# EAGLE board placa (EAGLE 9.7.0)
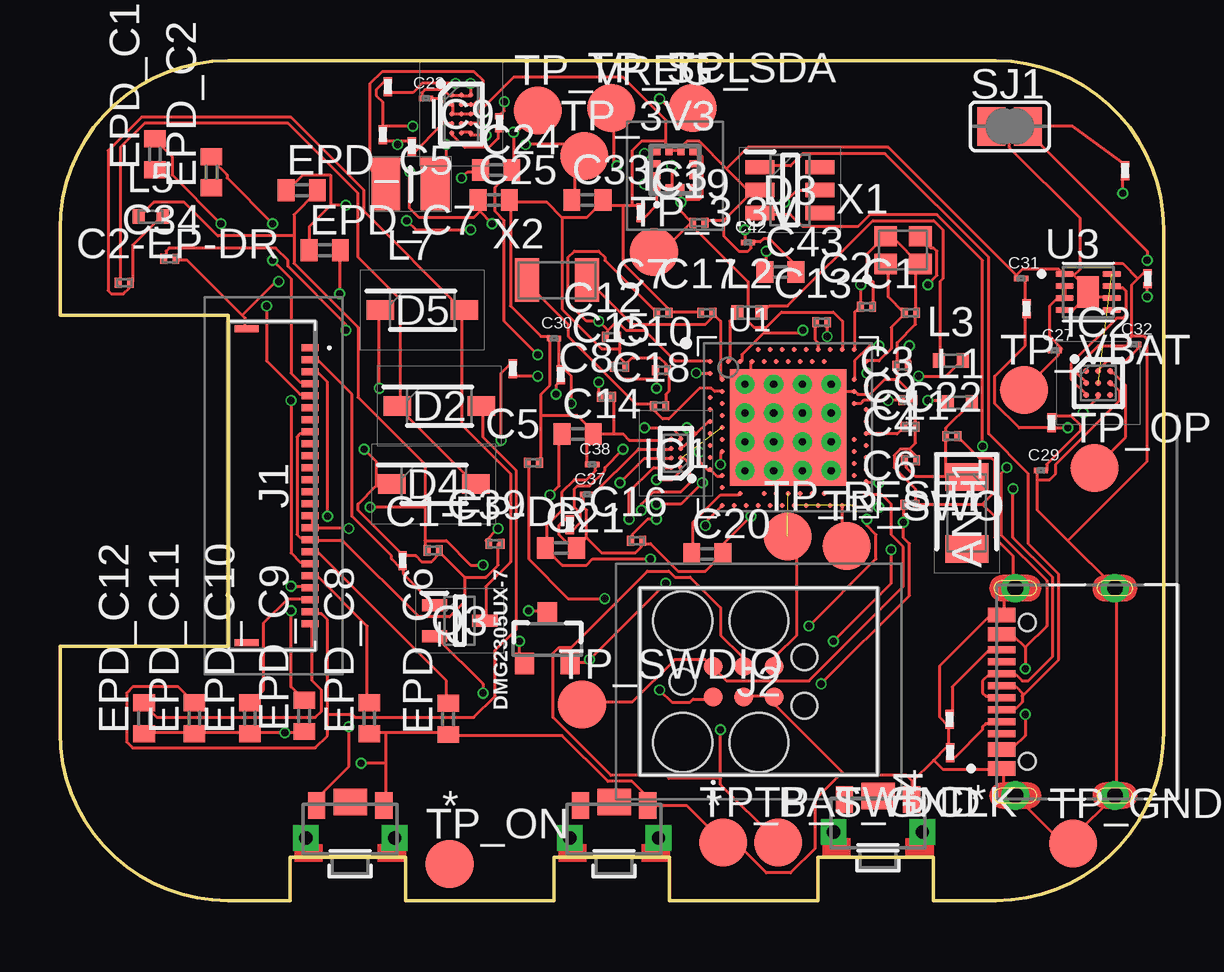
[diagram p0: board, top side]
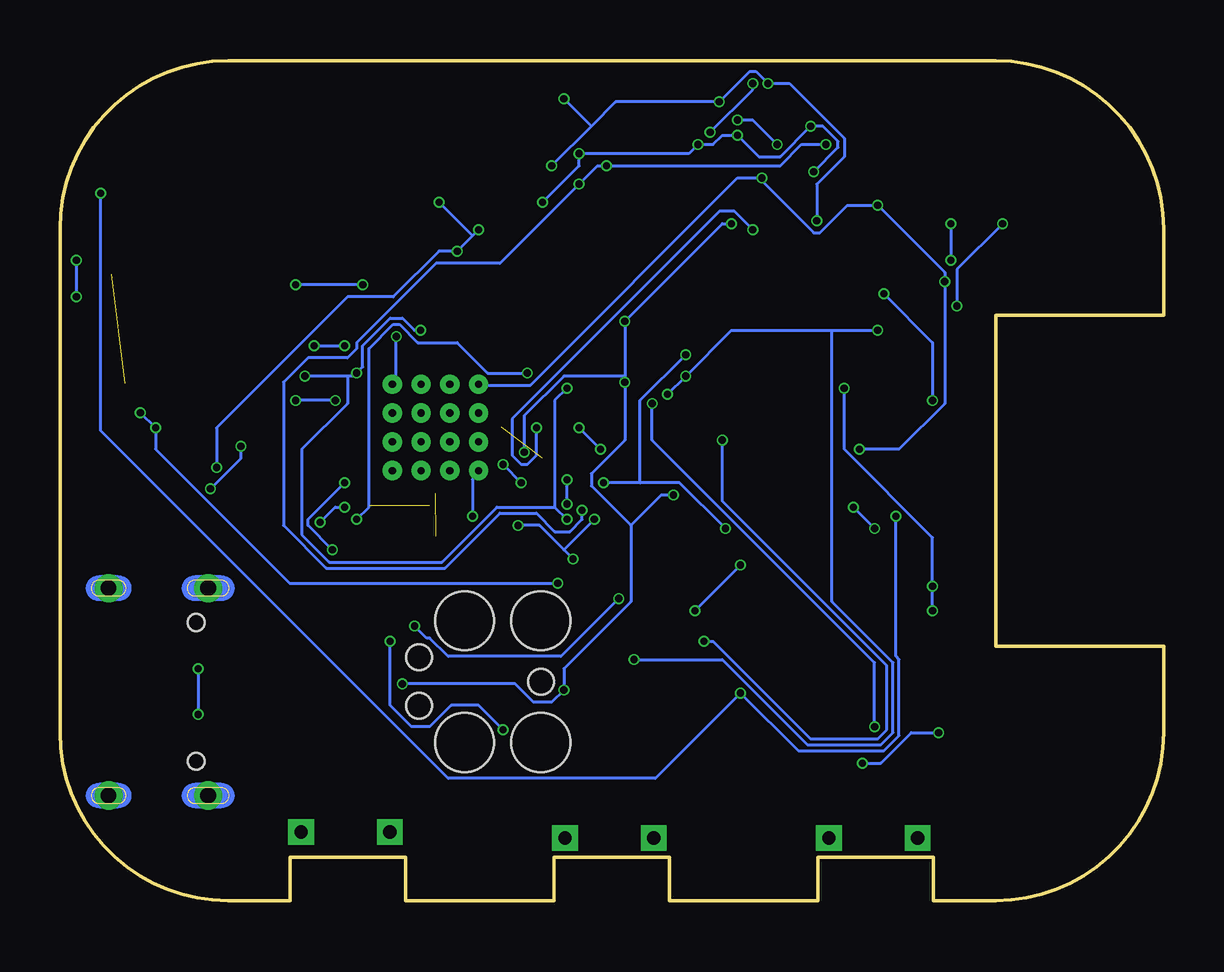
[diagram p1: board, bottom side, seen from below]

Size 46 x 35 mm. Coordinates in mm from the lower left corner, seen from the top.
Outline: 39,0 36.4,0 36.4,1.8 31.6,1.8 31.6,0 25.4,0 25.4,1.8 20.6,1.8 20.6,0 14.4,0 14.4,1.8 9.6,1.8 9.6,0 7,0 arc-90 0,7 0,10.6 7,10.6 7,24.4 0,24.4 0,28 arc-90 7,35 39,35 arc-90 46,28 46,7 arc-90 39,0
Copper layers (1*16): Top / Bottom
Stack-up Default Layer Stack: Top User Defined 0.035mm / Dielectric-1 User Defined 1.6mm / Bottom User Defined 0.035mm
Design rules: minimum drill size 0.3mm, minimum copper width 5mil, keepout clearance 0mil, drill distance 6mil, via restrict clearance 0mil, dimension clearance 0.2mm, restrict clearance 0mil, copper clearance wire_polygon to wire_polygon 5mil, copper clearance wire_polygon to pad_smd 5mil, copper clearance wire_polygon to via 5mil, copper clearance pad_smd to pad_smd 5mil, copper clearance pad_smd to via 5mil, copper clearance via to via 5mil, copper clearance smd to pad (same net) 5mil, copper clearance smd to via (same net) 5mil, copper clearance smd to smd (same net) 5mil

## Footprints (pad centres in the part's own frame; a part is rotated, then mirrored left to right if it is on the bottom)
2450AT18B100E_ANTC3216X140N = smd 1.15 x 1.8: 1 -1.5,0; 2 1.5,0
NORDIC_NRF_3_RESC0201_L = smd 0.28 x 0.43: 1 -0.255,0; 2 0.255,0
ESP32_C6_LIBRARY_1_ESP32_WROVER_EAGLE-LTSPICE_C0402 = smd 0.7 x 0.9: 1 -0.65,0; 2 0.65,0
GRM011R60J152KE01L_2_CAPC0201X13N = smd 0.22 x 0.23: 1 -0.185,0; 2 0.185,0
ESP32_C6_LIBRARY_5_SOD3716X135N = smd 1.15 x 0.8: 1 -1.75,0; 2 1.75,0
ESP32_C6_LIBRARY_3_SOT95P280X145-6N = smd 1.2 x 0.6: 1 -1.25,0.95; 2 -1.25,0; 3 -1.25,-0.95; 4 1.25,-0.95; 5 1.25,0; 6 1.25,0.95
ESP32_C6_LIBRARY_4_ESP32_C6_LIBRARY_4_ESP32_C6_LIBRARY_4_ESP32_C6_LIBRARY_4_ESP32_WROVER_SPARKFUN-DISCRETESEMI_SOT23-3 = smd 0.8 x 0.9: 1 -0.95,-1; 2 0.95,-1; 3 0,1.1
BQ25180YBGR_BGA8C40P2X4_100X155X50 = smd 0.2 x 0.2: A1 -0.2,0.6; A2 0.2,0.6; B1 -0.2,0.2; B2 0.2,0.2; C1 -0.2,-0.2; C2 0.2,-0.2; D1 -0.2,-0.6; D2 0.2,-0.6
DRV2605YZFR_BGA9C50P3X3_144X144X62 = smd 0.25 x 0.25: A1 -0.5,0.5; A2 0,0.5; A3 0.5,0.5; B1 -0.5,0; B2 0,0; B3 0.5,0; C1 -0.5,-0.5; C2 0,-0.5; C3 0.5,-0.5
BMA423_BMA423 = smd 0.3 x 0.35: 1 -0.75,-0.775; 2 -0.25,-0.775; 3 0.25,-0.775; 4 0.75,-0.775; 7 0.75,0.775; 8 0.25,0.775; 9 -0.25,0.775; 10 -0.75,0.775 | smd 0.35 x 0.3: 5 0.775,-0.25; 6 0.775,0.25; 11 -0.775,0.25; 12 -0.775,-0.25
RT6160AWSC_BGA15C40P3X5_140X230X60 = smd 0.216 x 0.216: A1 -0.4,0.8; A2 0,0.8; A3 0.4,0.8; B1 -0.4,0.4; B2 0,0.4; B3 0.4,0.4; C1 -0.4,0; C2 0,0; C3 0.4,0; D1 -0.4,-0.4; D2 0,-0.4; D3 0.4,-0.4; E1 -0.4,-0.8; E2 0,-0.8; E3 0.4,-0.8
503480-2400_5034802400 = smd 0.3 x 0.7: 1 -5.75,1.525; 2 -5.25,1.525; 3 -4.75,1.525; 4 -4.25,1.525; 5 -3.75,1.525; 6 -3.25,1.525; 7 -2.75,1.525; 8 -2.25,1.525; 9 -1.75,1.525; 10 -1.25,1.525; 11 -0.75,1.525; 12 -0.25,1.525; 13 0.25,1.525; 14 0.75,1.525; 15 1.25,1.525; 16 1.75,1.525; 17 2.25,1.525; 18 2.75,1.525; 19 3.25,1.525; 20 3.75,1.525; 21 4.25,1.525; 22 4.75,1.525; 23 5.25,1.525; 24 5.75,1.525 | smd 0.3 x 1: MP1 -6.54,-1.125; MP2 6.54,-1.125
TC2030-IDC_TC2030IDC = smd 0.783 x 0.783: 1 -0.953,-0.635; 2 -0.953,0.635; 3 0.317,-0.635; 4 0.317,0.635; 5 1.588,-0.635; 6 1.588,0.635 | hole 2.451: -2.223,-2.54; -2.223,2.54; 0.952,-2.54; 0.952,2.54 | hole 1.067: -2.223,0; 2.857,-1.016; 2.857,1.016
KH-TYPE-C-16P_KINGHELM_KH-TYPE-C-16P = smd 0.6 x 1.15: A1_B12 -3.2,4.725; A4_B9 -2.4,4.725; A9_B4 2.4,4.725; A12_B1 3.2,4.725 | smd 0.3 x 1.15: A5 -1.25,4.725; A6 -0.25,4.725; A7 0.25,4.725; A8 1.25,4.725; B5 1.75,4.725; B6 0.75,4.725; B7 -0.75,4.725; B8 -1.75,4.725 | drill 0.65 pad 1.05: SH1 -4.32,0; SH2 4.32,0; SH3 -4.32,4.15; SH4 4.32,4.15 | hole 0.7: -2.89,3.65; 2.89,3.65
NORDIC_NRF_2_RESC0402_L = smd 0.5 x 0.6: 1 -0.5,0; 2 0.5,0
MLP2016SR47MT0S1_INDC2016X100N = smd 1.2 x 2.2: 1 -1.028,0; 2 1.028,0
ESP32_C6_LIBRARY_6_SOT65P210X110-3N = smd 1.05 x 0.5: 1 -1.05,0.65; 2 -1.05,-0.65; 3 1.05,0
ERA-1AEB3401C_0201 = smd 0.35 x 0.25: 1 0,0.275; 2 0,-0.275
CPF0201D7K68C1_0201 = smd 0.35 x 0.25: 1 0,0.275; 2 0,-0.275
ESP32_C6_LIBRARY_7_JUMPER_SJ = smd 1.168 x 1.6: 1 -0.762,0; 2 0.762,0
2025-10-22_07-23-44_LIBRARY_SW_EVP-AKE31A_PAN = smd 0.711 x 1.092: 1 -1.4,-0.972; 2 1.4,-0.972 | drill 0.559 pad 0.914 square: 3 -1.848,0.381; 4 1.848,0.381 | smd 1.397 x 1.092: 5 0,-1.124
HECTOR_WATCH_1_TP20R = smd 2 x 2: TP 0,0
NORDIC_NRF_4_AQFN50P700X700X85_HS-74N = smd 4.85 x 4.85: P$74 0,0 | drill 0.3 pad 0.6: P$75 -1.8,1.8; P$76 -0.6,1.8; P$77 0.6,1.8; P$78 1.8,1.8; P$79 -1.8,0.6; P$80 -0.6,0.6; P$81 0.6,0.6; P$82 1.8,0.6; P$83 -1.8,-0.6; P$84 -0.6,-0.6; P$85 0.6,-0.6; P$86 1.8,-0.6; P$87 -1.8,-1.8; P$88 -0.6,-1.8; P$89 0.6,-1.8; P$90 1.8,-1.8 | smd 0.2 x 0.2: P$A8 -1.25,3.25; P$A10 -0.75,3.25; P$A12 -0.25,3.25; P$A14 0.25,3.25; P$A16 0.75,3.25; P$A18 1.25,3.25; P$A20 1.75,3.25; P$A22 2.25,3.25; P$A23 2.75,3.25; P$AA24 3.25,-2.25; P$AB2 -2.75,-2.5; P$AC5 -2,-2.75; P$AC9 -1,-2.75; P$AC11 -0.5,-2.75; P$AC13 0,-2.75; P$AC15 0.5,-2.75; P$AC17 1,-2.75; P$AC19 1.5,-2.75; P$AC21 2,-2.75; P$AC24 3.25,-2.75; P$AD2 -2.75,-3.25; P$AD4 -2.25,-3.25; P$AD6 -1.75,-3.25; P$AD8 -1.25,-3.25; P$AD10 -0.75,-3.25; P$AD12 -0.25,-3.25; P$AD14 0.25,-3.25; P$AD16 0.75,-3.25; P$AD18 1.25,-3.25; P$AD20 1.75,-3.25; P$AD22 2.25,-3.25; P$AD23 2.75,-3.25; P$B1 -3.25,2.75; P$B3 -2.5,2.75; P$B5 -2,2.75; P$B7 -1.5,2.75; P$B9 -1,2.75; P$B11 -0.5,2.75; P$B13 0,2.75; P$B15 0.5,2.75; P$B17 1,2.75; P$B19 1.5,2.75; P$B24 3.25,2.75; P$C1 -3.25,2.25; P$D2 -2.75,2; P$D23 2.75,2; P$E24 3.25,1.75; P$F2 -2.75,1.5; P$F23 2.75,1.5; P$G1 -3.25,1.25; P$H2 -2.75,1; P$H23 2.75,1; P$J1 -3.25,0.75; P$J24 3.25,0.75; P$K2 -2.75,0.5; P$L1 -3.25,0.25; P$L24 3.25,0.25; P$M2 -2.75,0; P$N1 -3.25,-0.25; P$N24 3.25,-0.25; P$P2 -2.75,-0.5; P$P23 2.75,-0.5; P$R1 -3.25,-0.75; P$R24 3.25,-0.75; P$T2 -2.75,-1; P$T23 2.75,-1; P$U1 -3.25,-1.25; P$U24 3.25,-1.25; P$V23 2.75,-1.5; P$W1 -3.25,-1.75; P$W24 3.25,-1.75; P$Y2 -2.75,-2; P$Y23 2.75,-2
ESP32_C6_LIBRARY_SON50P200X200X80-9N = smd 0.76 x 0.27: 1 -0.985,0.75; 2 -0.985,0.25; 3 -0.985,-0.25; 4 -0.985,-0.75; 5 0.985,-0.75; 6 0.985,-0.25; 7 0.985,0.25; 8 0.985,0.75 | smd 0.9 x 1.3: 9 0,0
NORDIC_NRF_BT-XTAL_2016_N = smd 0.95 x 0.85: 1 -0.725,-0.575; 2 0.725,-0.575; 3 0.725,0.575; 4 -0.725,0.575
NORDIC_NRF_1_XTAL_3215_N = smd 1 x 1.8: 1 -1.25,0; 2 1.25,0

## Placement (x,y rotation side)
ANT1  2450AT18B100E  [2450AT18B100E_ANTC3216X140N]  37.8,16.16 270 top
C1  12pF  [NORDIC_NRF_3_RESC0201_L]  35.45,24.5 0 top
C1-EP-DR  10uF  [NORDIC_NRF_3_RESC0201_L]  15.56,14.59 0 top
C2  12pF  [NORDIC_NRF_3_RESC0201_L]  33.62,24.75 0 top
C2-EP-DR  4.7uF/25V  [NORDIC_NRF_3_RESC0201_L]  2.68,25.75 0 top
C3  1pF  [NORDIC_NRF_3_RESC0201_L]  35.34,20.85 0 top
C4  1pF  [NORDIC_NRF_3_RESC0201_L]  35.45,18.35 0 top
C5  100nF  [NORDIC_NRF_3_RESC0201_L]  19.73,18.25 0 top
C6  4.7µF  [NORDIC_NRF_3_RESC0201_L]  35.43,16.5 0 top
C7  100nF  [NORDIC_NRF_3_RESC0201_L]  25.13,24.5 0 top
C8  100nF  [NORDIC_NRF_3_RESC0201_L]  22.78,21 0 top
C9  820pF  [NORDIC_NRF_3_RESC0201_L]  35.43,19.75 0 top
C10  N.C.  [NORDIC_NRF_3_RESC0201_L]  25.08,22.1 0 top
C11  100pF  [NORDIC_NRF_3_RESC0201_L]  35.1,22.29 180 top
C12  100nF  [NORDIC_NRF_3_RESC0201_L]  22.98,23.5 0 top
C13  N.C.  [NORDIC_NRF_3_RESC0201_L]  31.75,24.1 0 top
C14  4.7µF  [ESP32_C6_LIBRARY_1_ESP32_WROVER_EAGLE-LTSPICE_C0402]  21.58,19.45 0 top
C15  1.0µF  [NORDIC_NRF_3_RESC0201_L]  23.33,22.25 0 top
C16  47nF  [NORDIC_NRF_3_RESC0201_L]  24.04,15 0 top
C17  12pF  [NORDIC_NRF_3_RESC0201_L]  26.96,24.5 0 top
C18  12pF  [NORDIC_NRF_3_RESC0201_L]  24.99,20.6 0 top
C19  100nF  [NORDIC_NRF_3_RESC0201_L]  26.63,28.25 0 top
C20  4.7µF  [ESP32_C6_LIBRARY_1_ESP32_WROVER_EAGLE-LTSPICE_C0402]  26.98,14.45 0 top
C21  4.7µF  [ESP32_C6_LIBRARY_1_ESP32_WROVER_EAGLE-LTSPICE_C0402]  20.88,14.69 0 top
C22  N.C.  [NORDIC_NRF_3_RESC0201_L]  37.17,19.35 0 top
C23  0.1uF  [GRM011R60J152KE01L_2_CAPC0201X13N]  15.26,33.42 0 top
C24  10uF  [ESP32_C6_LIBRARY_1_ESP32_WROVER_EAGLE-LTSPICE_C0402]  18.18,30.45 0 top
C25  22uF  [ESP32_C6_LIBRARY_1_ESP32_WROVER_EAGLE-LTSPICE_C0402]  18.08,29.2 0 top
C27  0.1uF  [GRM011R60J152KE01L_2_CAPC0201X13N]  41.47,22.92 0 top
C29  1uF  [GRM011R60J152KE01L_2_CAPC0201X13N]  40.89,17.92 0 top
C30  1uF  [GRM011R60J152KE01L_2_CAPC0201X13N]  20.6,23.42 0 top
C31  1uF  [GRM011R60J152KE01L_2_CAPC0201X13N]  40.06,25.92 0 top
C32  1uF  [GRM011R60J152KE01L_2_CAPC0201X13N]  44.77,23.17 0 top
C33  22uF  [ESP32_C6_LIBRARY_1_ESP32_WROVER_EAGLE-LTSPICE_C0402]  21.98,29.2 0 top
C34  0.1uF  [NORDIC_NRF_3_RESC0201_L]  4.58,26.75 0 top
C37  1uF  [GRM011R60J152KE01L_2_CAPC0201X13N]  21.98,16.92 0 top
C38  1uF  [GRM011R60J152KE01L_2_CAPC0201X13N]  22.19,18.17 0 top
C39  10uF  [NORDIC_NRF_3_RESC0201_L]  18.14,14.87 0 top
C42  0.1uF  [GRM011R60J152KE01L_2_CAPC0201X13N]  28.68,27.42 0 top
C43  4.7uF  [ESP32_C6_LIBRARY_1_ESP32_WROVER_EAGLE-LTSPICE_C0402]  30.03,26.2 0 top
D2  ESP32_C6_LIBRARY_5_MBR0530  [ESP32_C6_LIBRARY_5_SOD3716X135N]  15.82,20.61 0 top
D3  USBLC6-2SC6Y  [ESP32_C6_LIBRARY_3_SOT95P280X145-6N]  30.43,29.61 0 top
D4  ESP32_C6_LIBRARY_5_MBR0530  [ESP32_C6_LIBRARY_5_SOD3716X135N]  15.59,17.36 0 top
D5  ESP32_C6_LIBRARY_5_MBR0530  [ESP32_C6_LIBRARY_5_SOD3716X135N]  15.11,24.61 0 top
DMG2305UX-7  20V/4.2A/52mΩ/1.4W  [ESP32_C6_LIBRARY_4_ESP32_C6_LIBRARY_4_ESP32_C6_LIBRARY_4_ESP32_C6_LIBRARY_4_ESP32_WROVER_SPARKFUN-DISCRETESEMI_SOT23-3]  20.31,10.88 0 top
EPD_C1  1uF/50V  [ESP32_C6_LIBRARY_1_ESP32_WROVER_EAGLE-LTSPICE_C0402]  3.96,31.1 90 top
EPD_C2  1uF/50V  [ESP32_C6_LIBRARY_1_ESP32_WROVER_EAGLE-LTSPICE_C0402]  6.32,30.35 90 top
EPD_C5  0.1uF/50V  [ESP32_C6_LIBRARY_1_ESP32_WROVER_EAGLE-LTSPICE_C0402]  10.08,29.6 0 top
EPD_C6  1uF/50V  [ESP32_C6_LIBRARY_1_ESP32_WROVER_EAGLE-LTSPICE_C0402]  16.18,7.57 90 top
EPD_C7  1uF/50V  [ESP32_C6_LIBRARY_1_ESP32_WROVER_EAGLE-LTSPICE_C0402]  11.04,27.1 0 top
EPD_C8  1uF/50V  [ESP32_C6_LIBRARY_1_ESP32_WROVER_EAGLE-LTSPICE_C0402]  12.9,7.6 90 top
EPD_C9  1uF/50V  [ESP32_C6_LIBRARY_1_ESP32_WROVER_EAGLE-LTSPICE_C0402]  10.18,7.7 90 top
EPD_C10  1uF/50V  [ESP32_C6_LIBRARY_1_ESP32_WROVER_EAGLE-LTSPICE_C0402]  7.92,7.6 90 top
EPD_C11  1uF/50V  [ESP32_C6_LIBRARY_1_ESP32_WROVER_EAGLE-LTSPICE_C0402]  5.6,7.6 90 top
EPD_C12  1uF/50V  [ESP32_C6_LIBRARY_1_ESP32_WROVER_EAGLE-LTSPICE_C0402]  3.51,7.6 90 top
IC1  BQ25180YBGR  [BQ25180YBGR_BGA8C40P2X4_100X155X50]  25.68,18.64 180 top
IC2  DRV2605YZFR  [DRV2605YZFR_BGA9C50P3X3_144X144X62]  43.28,21.57 0 top
IC3  BMA421  [BMA423_BMA423]  25.63,30.45 0 top
IC9  RT6160AWSC  [RT6160AWSC_BGA15C40P3X5_140X230X60]  16.73,32.78 0 top
J1  503480-2400  [503480-2400_5034802400]  8.9,17.29 270 top
J2  TC2030-IDC  [TC2030-IDC_TC2030IDC]  28.18,9.13 0 top
J4  KH-TYPE-C-16P  [KH-TYPE-C-16P_KINGHELM_KH-TYPE-C-16P]  43.97,8.7 90 top
L1  3.9nH  [NORDIC_NRF_2_RESC0402_L]  37.51,20.75 0 top
L2  10µH  [NORDIC_NRF_2_RESC0402_L]  28.73,24.5 0 top
L3  15nH  [NORDIC_NRF_2_RESC0402_L]  37.13,22.5 0 top
L5  68uH  [NORDIC_NRF_2_RESC0402_L]  3.78,28.5 0 top
L7  FTC252012SR47MBCA  [MLP2016SR47MT0S1_INDC2016X100N]  14.61,29.86 0 top
Q3  SI1308EDL-T1-GE3  [ESP32_C6_LIBRARY_6_SOT65P210X110-3N]  16.66,11.67 0 top
R1_EP_DR  0.47  [ERA-1AEB3401C_0201]  44.4,30.42 0 top
R1_USB  5K1  [CPF0201D7K68C1_0201]  37.11,6.17 0 top
R2  0  [CPF0201D7K68C1_0201]  18.32,32.42 0 top
R2_EP_DR  10K  [ERA-1AEB3401C_0201]  14.28,14.17 0 top
R2_USB  5K1  [ERA-1AEB3401C_0201]  37.08,7.56 0 top
R3  0  [ERA-1AEB3401C_0201]  24.2,28.67 0 top
R4  0  [CPF0201D7K68C1_0201]  14.66,31.42 0 top
R5  10k  [CPF0201D7K68C1_0201]  20.87,21.92 0 top
R7  10k  [CPF0201D7K68C1_0201]  41.33,19.92 0 top
R8  10k  [CPF0201D7K68C1_0201]  40.29,24.67 0 top
R9  10K  [ERA-1AEB3401C_0201]  21.25,15.67 0 top
R17  3K3  [CPF0201D7K68C1_0201]  13.46,31.92 0 top
R18  3K3  [CPF0201D7K68C1_0201]  13.67,33.92 0 top
R_PWR_EPD  10K  [CPF0201D7K68C1_0201]  18.88,22.17 0 top
R_TYPE_SEL  2.2  [ERA-1AEB3401C_0201]  45.34,25.92 0 top
SJ1  [ESP32_C6_LIBRARY_7_JUMPER_SJ]  39.59,32.26 0 top
SW_DN  2025-10-22_07-23-44_LIBRARY_EVP-AKE31ASW_EVP-AKE31A_PAN  [2025-10-22_07-23-44_LIBRARY_SW_EVP-AKE31A_PAN]  34.1,3.24 180 top
SW_ENT  2025-10-22_07-23-44_LIBRARY_EVP-AKE31ASW_EVP-AKE31A_PAN  [2025-10-22_07-23-44_LIBRARY_SW_EVP-AKE31A_PAN]  23.1,2.99 180 top
SW_UP  2025-10-22_07-23-44_LIBRARY_EVP-AKE31ASW_EVP-AKE31A_PAN  [2025-10-22_07-23-44_LIBRARY_SW_EVP-AKE31A_PAN]  12.1,2.99 180 top
TP_3.3V  HECTOR_WATCH_1_TPTP20R  [HECTOR_WATCH_1_TP20R]  24.76,27.03 0 top
TP_3V3  HECTOR_WATCH_1_TPTP20R  [HECTOR_WATCH_1_TP20R]  21.86,31.03 0 top
TP_BAT_GND  HECTOR_WATCH_1_TPTP20R  [HECTOR_WATCH_1_TP20R]  27.64,2.43 0 top
TP_GND  HECTOR_WATCH_1_TPTP20R  [HECTOR_WATCH_1_TP20R]  42.23,2.38 0 top
TP_ON  HECTOR_WATCH_1_TPTP20R  [HECTOR_WATCH_1_TP20R]  16.24,1.53 0 top
TP_OP  HECTOR_WATCH_1_TPTP20R  [HECTOR_WATCH_1_TP20R]  43.12,18.03 0 top
TP_RESET  HECTOR_WATCH_1_TPTP20R  [HECTOR_WATCH_1_TP20R]  30.33,15.18 0 top
TP_SCL  HECTOR_WATCH_1_TPTP20R  [HECTOR_WATCH_1_TP20R]  22.98,33.03 0 top
TP_SDA  HECTOR_WATCH_1_TPTP20R  [HECTOR_WATCH_1_TP20R]  26.37,33.03 0 top
TP_SWDCLK  HECTOR_WATCH_1_TPTP20R  [HECTOR_WATCH_1_TP20R]  29.94,2.43 0 top
TP_SWDIO  HECTOR_WATCH_1_TPTP20R  [HECTOR_WATCH_1_TP20R]  21.76,8.18 0 top
TP_SWO  HECTOR_WATCH_1_TPTP20R  [HECTOR_WATCH_1_TP20R]  32.79,14.78 0 top
TP_VBAT  HECTOR_WATCH_1_TPTP20R  [HECTOR_WATCH_1_TP20R]  40.18,21.28 0 top
TP_VREG  HECTOR_WATCH_1_TPTP20R  [HECTOR_WATCH_1_TP20R]  19.92,32.93 0 top
U1  NRF52840_QF  [NORDIC_NRF_4_AQFN50P700X700X85_HS-74N]  30.35,19.72 0 top
U3  MAX17048G+T10  [ESP32_C6_LIBRARY_SON50P200X200X80-9N]  42.86,25.36 0 top
X1  32MHz  [NORDIC_NRF_BT-XTAL_2016_N]  35.14,27.11 0 top
X2  32.768kHz  [NORDIC_NRF_1_XTAL_3215_N]  20.72,25.86 0 top

## Library data of the parts
ANT1 = InkTime_v5 (1); ARROW_PART_NUMBER: 2450AT18B100E; ARROW_PRICE-STOCK: https://www.arrow.com/en/products/2450at18b100e/johanson-dielectrics?utm_currency=USD&region=nac; DESCRIPTION: Antennas 2.45GHz ANTENNA; HEIGHT: 1.4mm; MANUFACTURER_NAME: JOHANSON TECHNOLOGY; MANUFACTURER_PART_NUMBER: 2450AT18B100E; MOUSER_PART_NUMBER: 609-2450AT18B100E; MOUSER_PRICE-STOCK: https://www.mouser.co.uk/ProductDetail/Johanson-Technology/2450AT18B100E?qs=yCnrNFeXz%252Bh5MFsFIXGZGA%3D%3D
C1 C1-EP-DR C2 C2-EP-DR C3-C13 C15-C19 C22 C34 C39 L1-L3 L5 R1_EP_DR R1_USB R2 R2_EP_DR R2_USB R3-R5 R7-R9 R17 R18 R_PWR_EPD R_TYPE_SEL SJ1 TP_3.3V TP_3V3 TP_BAT_GND TP_GND TP_ON TP_OP TP_RESET TP_SCL TP_SDA TP_SWDCLK TP_SWDIO TP_SWO TP_VBAT TP_VREG U1 X1 X2 = InkTime_v5 (1)
C14 C20 C21 C24 C25 C33 C43 EPD_C1 EPD_C2 EPD_C5-EPD_C12 = InkTime_v5 (1); SPICEMODEL: NONE; SPICEPREFIX: C
C23 C27 C29-C32 C37 C38 C42 = InkTime_v5 (1); AVAILABILITY: In Stock; CHECK_PRICES: https://www.snapeda.com/parts/GRM011R60J152KE01L/Murata/view-part/?ref=eda; DESCRIPTION: SMD Capacitor X5R(EIA) with Capacitance: 1500pF Tol. 10%. Rated Voltage: 6.3Vdc; MF: Murata; MP: GRM011R60J152KE01L; PACKAGE: 0201 Murata; PRICE: None; SNAPEDA_LINK: https://www.snapeda.com/parts/GRM011R60J152KE01L/Murata/view-part/?ref=snap
D2 D4 D5 = InkTime_v5 (1); AVAILABILITY: In Stock; CHECK_PRICES: https://www.snapeda.com/parts/MBR0530/Onsemi/view-part/?ref=eda; DESCRIPTION: Diode Schottky 30 V 500mA Surface Mount SOD-123; MF: ON Semiconductor; MP: MBR0530; PACKAGE: SOD-123-2 ON Semiconductor; PRICE: None; PURCHASE-URL: https://www.snapeda.com/api/url_track_click_mouser/?unipart_id=179458&manufacturer=ON Semiconductor&part_name=MBR0530&search_term=None; SNAPEDA_LINK: https://www.snapeda.com/parts/MBR0530/Onsemi/view-part/?ref=snap
D3 = InkTime_v5 (1); AVAILABILITY: In Stock; CHECK_PRICES: https://www.snapeda.com/parts/USBLC6-2SC6Y/STMicroelectronics/view-part/?ref=eda; DESCRIPTION: 17V Clamp 5A (8/20µs) Ipp Tvs Diode Surface Mount SOT-23-6; MF: STMicroelectronics; MP: USBLC6-2SC6Y; PACKAGE: SOT-23-6 STMicroelectronics; PRICE: None; SNAPEDA_LINK: https://www.snapeda.com/parts/USBLC6-2SC6Y/STMicroelectronics/view-part/?ref=snap
DMG2305UX-7 = InkTime_v5 (1); PROD_ID: TRAN-14388
IC1 = InkTime_v5 (1); ARROW_PART_NUMBER: BQ25180YBGR; ARROW_PRICE-STOCK: https://www.arrow.com/en/products/bq25180ybgr/texas-instruments?utm_currency=USD&region=nac; DESCRIPTION: Charger IC Lithium Ion/Polymer, Lithium Iron Phosphate 8-DSBGA (1.6x1.1); HEIGHT: 0.5mm; MANUFACTURER_NAME: Texas Instruments; MANUFACTURER_PART_NUMBER: BQ25180YBGR; MOUSER_PART_NUMBER: 595-BQ25180YBGR; MOUSER_PRICE-STOCK: https://www.mouser.co.uk/ProductDetail/Texas-Instruments/BQ25180YBGR?qs=doiCPypUmgEWjAK%252BJAX6Tw%3D%3D
IC2 = InkTime_v5 (1); ARROW_PART_NUMBER: DRV2605YZFR; ARROW_PRICE-STOCK: https://www.arrow.com/en/products/drv2605yzfr/texas-instruments?region=nac; DESCRIPTION: Haptic Driver for ERM/LRA with Built-In Library and Smart Loop Architecture; HEIGHT: 0.625mm; MANUFACTURER_NAME: Texas Instruments; MANUFACTURER_PART_NUMBER: DRV2605YZFR
IC3 = InkTime_v5 (1); ARROW_PART_NUMBER: BMA423; ARROW_PRICE-STOCK: https://www.arrow.com/en/products/bma423/bosch; DESCRIPTION: Accelerometers Triaxial low-g 12bit Acceleration Sensor; HEIGHT: 1mm; MANUFACTURER_NAME: BOSCH; MANUFACTURER_PART_NUMBER: BMA423; MOUSER_PART_NUMBER: 262-BMA423; MOUSER_PRICE-STOCK: https://www.mouser.co.uk/ProductDetail/Bosch-Sensortec/BMA423?qs=HXFqYaX1Q2xC%252BSgeGoX3mg%3D%3D
IC9 = InkTime_v5 (1); DESCRIPTION: Buck-Boost Regulator Positive Output Step-Up/Step-Down I2C DC-DC Controller IC 15-WL-CSP (BSC) (1.4x2.3); HEIGHT: 0.6mm; MANUFACTURER_NAME: RICHTEK; MANUFACTURER_PART_NUMBER: RT6160AWSC; MOUSER_PART_NUMBER: 835-RT6160AWSC; MOUSER_PRICE-STOCK: https://www.mouser.co.uk/ProductDetail/Richtek/RT6160AWSC?qs=amGC7iS6iy%2FLd9PSoixZXQ%3D%3D
J1 = InkTime_v5 (1); DESCRIPTION: FFC & FPC Connectors 0.5mm FPC RA SMT Dual Contact 24Ckt; HEIGHT: 1.87mm; MANUFACTURER_NAME: Molex; MANUFACTURER_PART_NUMBER: 503480-2400; MOUSER_PART_NUMBER: 538-503480-2400; MOUSER_PRICE-STOCK: https://www.mouser.co.uk/ProductDetail/Molex/503480-2400?qs=OAhjpuo3Vu7efIoxFh9AOw%3D%3D
J2 = InkTime_v5 (1); DESCRIPTION: CABLE ADAPTER 6 POS; HEIGHT: 19mm; MANUFACTURER_NAME: Tag Connect; MANUFACTURER_PART_NUMBER: TC2030-IDC
J4 = InkTime_v5 (1); AVAILABILITY: Not in stock; CHECK_PRICES: https://www.snapeda.com/parts/KH-TYPE-C-16P/Kinghelm/view-part/?ref=eda; MF: kinghelm; MP: KH-TYPE-C-16P; PACKAGE: None; PRICE: None; SNAPEDA_LINK: https://www.snapeda.com/parts/KH-TYPE-C-16P/Kinghelm/view-part/?ref=snap
L7 = InkTime_v5 (1); DESCRIPTION: SMD / SMT Inductors (Coils), L=0.47?H, L x W x T :; HEIGHT: 1mm; JLCPCB: https://jlcpcb.com/partdetail/6763488-FTC252012SR47MBCA/C5832368; MANUFACTURER_NAME: TDK; MANUFACTURER_PART_NUMBER: FTC252012SR47MBCA
Q3 = InkTime_v5 (1); AVAILABILITY: In Stock; CHECK_PRICES: https://www.snapeda.com/parts/SI1308EDL-T1-GE3/Vishay+Siliconix/view-part/?ref=eda; DESCRIPTION: Si1308EDL-T1-GE3 N-channel MOSFET Transistor, 1.5 A, 30 V, 3-Pin SC-70 | Siliconix / Vishay SI1308EDL-T1-GE3; MF: Vishay Siliconix; MP: SI1308EDL-T1-GE3; PACKAGE: SOT-323 Vishay Semiconductor; PRICE: None; PURCHASE-URL: https://www.snapeda.com/api/url_track_click_mouser/?unipart_id=274603&manufacturer=Vishay Siliconix&part_name=SI1308EDL-T1-GE3&search_term=None; SNAPEDA_LINK: https://www.snapeda.com/parts/SI1308EDL-T1-GE3/Vishay+Siliconix/view-part/?ref=snap
SW_DN SW_ENT SW_UP = InkTime_v5 (1); COPYRIGHT: Copyright (C) 2025 Ultra Librarian. All rights reserved.; DIGI-KEY_PART_NUMBER_1: P123437TR-ND; DIGI-KEY_PART_NUMBER_2: P123437CT-ND; DIGI-KEY_PART_NUMBER_3: P123437DKR-ND; MANUFACTURER_NAME: Panasonic; MANUFACTURER_PART_NUMBER: EVP-AKE31A
U3 = InkTime_v5 (1); AVAILABILITY: In Stock; CHECK_PRICES: https://www.snapeda.com/parts/MAX17048G+T10/Analog+Devices/view-part/?ref=eda; DESCRIPTION: 3µA 1-Cell/2-Cell Fuel Gauge with ModelGauge; MF: Analog Devices; MP: MAX17048G+T10; PACKAGE: TDFN-8 Maxim; PRICE: None; PURCHASE-URL: https://www.snapeda.com/api/url_track_click_mouser/?unipart_id=329239&manufacturer=Analog Devices&part_name=MAX17048G+T10&search_term=None; SNAPEDA_LINK: https://www.snapeda.com/parts/MAX17048G+T10/Analog+Devices/view-part/?ref=snap

## Nets
3V3/1.7D: C34.1 DMG2305UX-7.2 IC2.C2 R5.2 R7.2 R8.2 R_PWR_EPD.2
3V3/2.4A: C6.1 C7.1 C8.1 C12.1 C14.1 C19.1 C25.1 C33.1 IC3.3 IC3.7 IC3.10 IC9.E2 IC9.E3 J2.1 R17.1 R18.1 TP_3.3V.TP TP_3V3.TP U1.P$A22 U1.P$AD14 U1.P$AD23 U1.P$B1 U1.P$W1 U1.P$Y2
ALERT/1.6C: U3.5
ALERT/2.5C: U1.P$J24
D+/1.5D: D3.4
D+/2.7D: U1.P$AD6
D-/1.5D: D3.6
D-/2.7D: U1.P$AD4
DN: D3.1 J4.A7 J4.B7
DP: D3.3 J4.A6 J4.B6
EPD_3V3: C1-EP-DR.1 DMG2305UX-7.3 EPD_C5.2 J1.15 J1.16 L5.1
EPD_BUSY/1.5D: J1.9
EPD_BUSY/2.2D: U1.P$AD12
EPD_CS/1.4C: J1.12
EPD_CS/2.2D: U1.P$K2
EPD_DC/1.5D: J1.11
EPD_DC/2.2D: U1.P$AD10
EPD_RST/1.5D: J1.10
EPD_RST/2.2D: U1.P$AC11
GDR: J1.2 Q3.1 R2_EP_DR.2
GND: C1-EP-DR.2 C1.2 C2.2 C3.2 C4.2 C5.2 C6.2 C7.2 C8.2 C9.2 C10.2 C11.2 C12.2 C13.2 C14.2 C15.2 C16.2 C17.1 C18.2 C19.2 C20.2 C21.2 C22.2 C23.2 C24.1 C25.2 C29.1 C30.1 C31.1 C32.1 C33.2 C34.2 C37.1 C38.1 C39.2 C42.2 C43.2 D3.2 D4.1 EPD_C5.1 EPD_C6.1 EPD_C7.1 EPD_C8.1 EPD_C9.1 EPD_C10.1 EPD_C11.1 EPD_C12.1 IC1.D2 IC2.B1 IC2.B3 IC3.8 IC3.9 IC9.B1 IC9.C1 IC9.C2 IC9.C3 J1.8 J1.17 J1.MP1 J2.3 J2.5 J4.A1_B12 J4.A12_B1 J4.SH1 J4.SH2 J4.SH3 J4.SH4 R1_USB.1 R2_EP_DR.1 R2_USB.2 R3.1 R9.1 R_TYPE_SEL.1 SJ1.1 SW_DN.1 SW_ENT.1 SW_UP.1 TP_BAT_GND.TP TP_GND.TP U1.P$74 U1.P$75 U1.P$76 U1.P$77 U1.P$78 U1.P$79 U1.P$80 U1.P$81 U1.P$82 U1.P$83 U1.P$84 U1.P$85 U1.P$86 U1.P$87 U1.P$88 U1.P$89 U1.P$90 U1.P$B7 U1.P$F23 U3.1 U3.4 U3.6 U3.9 X1.2 X1.4
HAPTIC_EN/1.4C: IC2.A1
HAPTIC_EN/2.6A: U1.P$U1
IMU_INT1: U1.P$N1
IMU_INT2: U1.P$P2
JJ: C10.1 C15.1 C16.1 L3.2 U1.P$B5 U1.P$E24
LX1: IC9.B2 IC9.B3 L7.1
LX2: IC9.D2 IC9.D3 L7.2
MOSI/1.5B: J1.14
MOSI/2.2D: U1.P$B13
MU_INT1: IC3.5
MU_INT2: IC3.6
N$1: IC1.D1 R9.2
N$2: IC9.D1 R4.2
N$3: IC9.E1 R2.2
N$4: IC3.1 R3.2
N$5: C20.1 U1.P$AC5
N$6: C18.1 U1.P$F2 X2.1
N$7: C17.2 U1.P$D2 X2.2
N$8: C5.1 U1.P$C1
N$9: C9.1 U1.P$N24
N$10: L2.1 U1.P$B3
N$11: L2.2 L3.1
N$12: C3.1 L1.1 U1.P$H23
N$13: ANT1.1 C4.1 C22.1 L1.2
N$14: C11.1 U1.P$D23
N$15: C2.1 U1.P$A23 X1.3
N$16: C1.1 U1.P$B24 X1.1
N$17: C2-EP-DR.2 D5.2 L5.2 Q3.3
N$18: C2-EP-DR.1 D2.1 D4.2
N$20: R1_EP_DR.1 R_TYPE_SEL.2 SJ1.2
N$21: J1.MP2
N$22: C13.1 U1.P$A18
N$23: C32.2 IC2.A2
N$24: EPD_C2.2 J1.4
N$25: EPD_C1.2 J1.5
N$26: EPD_C2.1
N$27: EPD_C1.1
N$28: EPD_C6.2 J1.18
N$29: EPD_C7.2 J1.19
N$30: EPD_C8.2 J1.20
N$31: J4.A5 R1_USB.2
N$32: EPD_C10.2 J1.22
N$33: C31.2 R8.1
N$34: EPD_C12.2 J1.24
N$35: J4.B5 R2_USB.1
N$36: C29.2 R7.1
OUT: IC2.C3
OUT+: IC2.A3 TP_OP.TP
OUT-: TP_ON.TP
P0.04: U1.P$J1
P0.09: U1.P$L24
P0.13/1.5D: C30.2 R5.1 SW_UP.2
P0.13/2.6C: U1.P$AD8
P0.14/1.5D: SW_ENT.2
P0.14/2.7C: U1.P$AC9
P0.19: U1.P$AC15
P0.20: U1.P$AD16
P0.21: U1.P$AC17
P0.22: U1.P$AD18
P0.23: U1.P$AC19
P0.24: U1.P$AD20
P0.25: U1.P$AC21
P0.26: U1.P$G1
P0.27: U1.P$H2
P0.28: U1.P$B11
P0.29: U1.P$A10
P0.30: U1.P$B9
P0.31: U1.P$A8
P1.01/1.6C: DMG2305UX-7.1 R_PWR_EPD.1
P1.01/2.4B: U1.P$Y23
P1.02/1.6C: SW_DN.2
P1.02/2.8C: U1.P$W24
P1.03: U1.P$V23
P1.04: U1.P$U24
P1.05: U1.P$T23
P1.06: U1.P$R24
P1.07: U1.P$P23
P1.09: U1.P$R1
P1.10: U1.P$A20
P1.11: U1.P$B19
P1.12: U1.P$B17
P1.13: U1.P$A16
P1.14: U1.P$B15
P1.15: U1.P$A14
PMIC_INT: IC1.A1 U1.P$T2
PREVGH: D5.1 EPD_C9.2 J1.21
PREVGL: D2.2 EPD_C11.2 J1.23
RESE: J1.3 Q3.2 R1_EP_DR.2
RESET: J2.6 TP_RESET.TP U1.P$AC13
SCK/1.5B: J1.13
SCK/2.2D: U1.P$A12
SCL/1.4C: IC2.C1 U3.7
SCL/2.4C: IC1.B1 IC3.12 R4.1 R17.2 TP_SCL.TP U1.P$M2
SDA/1.4C: IC2.B2 U3.8
SDA/2.4C: IC1.C1 IC3.2 R2.1 R18.2 TP_SDA.TP U1.P$L1
SWDCLK: J2.4 TP_SWDCLK.TP U1.P$AA24
SWDIO: J2.2 TP_SWDIO.TP U1.P$AC24
SWO: TP_SWO.TP U1.P$AD22
VBAT/1.2A: C27.2 TP_VBAT.TP U3.2 U3.3
VBAT/2.5C: C37.2 IC1.C2
VBUS/1.5D: C42.1 C43.1 D3.5 J4.A4_B9 J4.A9_B4
VBUS/2.6D: C21.1 C38.2 IC1.A2 U1.P$AD2
VREG: C23.1 C24.2 C39.1 IC1.B2 IC9.A1 IC9.A2 IC9.A3 TP_VREG.TP

## Tracks (layer width: path | path; a pad name or v marks a point on that pad's centre or on a via)
3V3/1.7D  (via drill 0.3)
  Top 0.127: v19.92,21.86 18.9,21.86 R_PWR_EPD.2 | v20.68,21.1 20.68,21.48 20.8,21.61 R5.2 | v11.91,23.76 11.91,24.02 9.5,26.43 9.5,26.69 8.99,27.19 4.55,27.19 4.42,27.07 4.42,26.81 C34.1 | v42.65,20.33 43.28,20.97 IC2.C2 | v42.01,19.7 41.38,19.7 R7.2 41.25,19.7 39.98,19.7 38.97,20.72 38.97,21.86 40.24,23.13 40.24,24.27 R8.2 | v25.25,13.22 v22.08,10.05 21.95,9.92 21.31,9.92 DMG2305UX-7.2
  Bottom 0.127: v20.68,21.1 v19.92,21.86 18.01,23.76 13.82,23.76 | 13.82,23.76 v11.91,23.76 | v42.65,20.33 v42.01,19.7 42.01,18.81 36.43,13.22 v25.25,13.22 | 13.82,23.76 13.82,12.46 11.28,9.92 11.28,7 11.79,6.49 14.84,6.49 18.39,10.05 v22.08,10.05
3V3/2.4A  (via drill 0.3)  (1 unrouted)
  Top 0.127: R18.1 13.57,34.18 13.19,33.8 13.19,33.54 13.44,33.29 13.44,32.27 R17.1 13.57,32.27 v14.71,32.27 | IC9.E2 16.74,32.02 17.12,32.02 IC9.E3 17.12,31.89 v17.76,31.89 | v19.41,31.51 21.44,31.51 21.82,31.13 TP_3V3.TP 21.82,31 21.44,30.62 21.44,29.22 C33.1 | v24.36,31.13 24.87,31.13 IC3.10 | 26.27,28.21 28.68,25.8 28.68,24.14 28.93,23.89 29.44,23.89 30.08,24.53 32.23,24.53 32.62,24.14 32.62,23 U1.P$A22 | 25.89,29.22 v25.89,29.1 25.89,28.72 26.27,28.34 C19.1 26.27,28.21 | 25.89,29.22 25.89,29.61 IC3.3 | 25.89,29.22 26.65,29.22 26.77,29.35 26.77,31 26.65,31.13 26.39,31.13 IC3.7 | 26.27,28.21 25.12,27.07 24.87,27.07 TP_3.3V.TP | v34.14,16.4 33.12,16.4 U1.P$AD23 | C6.1 35.16,16.4 v35.16,15.76 35.16,15.13 35.41,14.87 35.41,12.72 v31.73,9.03 | U1.P$Y2 27.54,17.67 27.41,17.67 27.16,17.92 U1.P$W1 27.03,17.92 26.65,18.3 v26.65,18.68 | 22.84,23.76 23.09,24.02 23.34,24.02 23.6,23.76 24.36,23.76 25.63,22.49 27.03,22.49 U1.P$B1 | 22.84,23.76 22.84,23.51 C12.1 | v22.46,21.61 22.46,21.1 C8.1 | 22.84,23.76 v22.46,24.14 21.95,24.14 21.19,24.91 21.19,26.81 21.44,27.07 22.46,27.07 22.71,26.81 22.71,26.69 24.87,24.53 C7.1 | v25,8.78 25.5,8.27 26.27,8.27 26.39,8.4 27.16,8.4 J2.1 | v20.42,16.91 20.8,17.29 20.8,19.45 C14.1 | 17.5,28.72 17.5,29.1 C25.1 | v18.01,28.21 17.5,28.72 | v14.58,30.37 14.58,28.84 14.96,28.46 17.25,28.46 17.5,28.72
  Bottom 0.127: v25.89,29.1 24.36,30.62 v24.36,31.13 19.79,31.13 v19.41,31.51 18.77,31.51 18.39,31.89 v17.76,31.89 16.87,31 15.98,31 v14.71,32.27 14.2,32.27 13.57,31.64 13.57,31.38 v14.58,30.37 | v34.14,16.4 34.52,16.4 v35.16,15.76 | 22.46,21.86 v22.46,24.14 18.39,28.21 v18.01,28.21 | 22.46,21.86 v22.46,21.61 22.46,19.19 23.85,17.8 23.85,17.29 22.2,15.64 | v26.65,18.68 26.65,20.21 25,21.86 22.46,21.86 | 22.2,15.64 22.2,12.46 25,9.67 v25,8.78 25.5,8.27 26.27,8.27 27.03,9.03 v31.73,9.03 | v20.42,16.91 20.93,16.91 22.2,15.64
DN
  Top 0.127: 40.11,8.52 40.11,8.65 39.86,8.91 39.35,8.91 J4.A7 | 40.11,8.52 40.11,8.27 39.86,8.02 39.35,8.02 J4.B7 | 40.11,8.52 41.63,10.05 41.63,13.6 40.36,14.87 40.36,17.8 38.71,19.45 38.71,26.81 34.39,31.13 30.97,31.13 30.46,30.62 29.19,30.62 D3.1
DP  (via drill 0.3)
  Top 0.127: J4.A6 39.22,8.52 38.58,8.52 38.46,8.65 38.46,9.16 38.71,9.41 39.22,9.41 J4.B6 39.35,9.41 39.86,9.41 40.11,9.16 40.36,9.16 41.38,10.17 41.38,13.48 39.73,15.13 v39.73,17.16 | v38.46,18.94 38.46,26.69 36.55,28.59 33.76,28.59 33.25,28.08 30.97,28.08 30.46,28.59 29.19,28.59 D3.3
  Bottom 0.127: v38.46,18.94 38.46,18.43 v39.73,17.16
EPD_3V3  (via drill 0.3)
  Top 0.127: J1.15 10.52,16.02 10.52,15.64 J1.16 10.52,15.51 v12.04,15.51 | 15.22,16.4 15.22,18.18 12.42,20.97 12.42,23.89 9.76,26.56 9.76,27.7 | 15.22,16.4 15.22,15 | 15.22,15 15.22,14.62 C1-EP-DR.1 | 9.76,27.7 9.76,28.59 10.65,29.48 EPD_C5.2 | 9.76,27.7 6.58,27.7 5.18,29.1 3.91,29.1 3.41,28.59 L5.1 | 15.22,16.4 v12.93,16.4 | v19.53,12.08 20.3,12.08 DMG2305UX-7.3 | v17.63,13.98 17.12,13.98 16.11,15 15.22,15
  Bottom 0.127: v12.93,16.4 v12.04,15.51 | v17.63,13.98 v19.53,12.08
GDR
  Top 0.127: Q3.1 15.6,12.33 14.33,13.6 14.33,13.86 R2_EP_DR.2 14.2,13.86 13.82,14.24 13.82,14.37 12.17,16.02 12.17,21.1 10.77,22.49 10.52,22.49 J1.2
GND  (via drill 0.3)
  Top 0.127: C2.2 33.89,24.78 33.89,25.8 33.63,26.05 33.63,26.94 34.39,27.7 X1.4 34.52,27.57 34.78,27.57 35.79,26.56 X1.2 35.79,26.43 35.66,26.3 35.66,24.53 C1.2 35.66,24.4 35.66,24.02 34.9,23.26 34.9,22.37 C11.2 34.9,22.24 34.9,21.73 | 34.9,21.73 35.66,20.97 C3.2 35.66,20.84 35.66,19.83 C9.2 35.66,19.7 35.66,19.06 35.41,18.81 | 35.41,18.81 35.03,18.81 34.78,18.56 34.78,18.05 35.66,17.16 35.66,16.52 C6.2 35.79,16.52 38.46,16.52 | 35.41,18.81 35.79,18.43 C4.2 | 38.46,16.52 38.97,17.03 38.97,18.3 38.84,18.43 38.33,18.43 37.44,19.32 C22.2 | 38.46,16.52 38.97,16.02 38.97,15.13 39.73,14.37 39.73,13.1 J4.SH4 39.73,12.97 39.35,12.59 39.35,11.95 J4.A12_B1 39.22,11.83 38.71,11.83 36.68,9.79 36.68,7.63 37.06,7.25 | 21.95,15.13 21.95,16.27 21.82,16.4 21.82,16.91 C37.1 | 21.95,15.13 21.57,14.75 C21.2 21.44,14.62 20.8,15.25 20.8,15.64 21.06,15.89 21.19,15.89 R9.1 | 21.95,15.13 22.58,14.49 23.98,14.49 24.23,14.75 24.23,14.87 C16.2 24.36,14.87 24.62,14.87 25.76,13.73 26.9,13.73 27.54,14.37 C20.2 27.66,14.49 27.66,14.87 v28.81,16.02 | v31.98,23.51 31.98,24.02 C13.2 | 28.55,21.61 28.81,21.86 28.81,22.49 U1.P$B7 | 33.12,21.22 32.49,21.22 32.23,21.48 | 28.55,19.06 U1.P$87 | 28.55,19.06 U1.P$83 | 28.55,19.06 U1.P$74 | 30.84,17.92 29.82,17.92 U1.P$88 | U1.P$84 29.69,19.19 29.69,19.45 U1.P$74 | 30.84,17.92 U1.P$89 | 30.84,17.92 U1.P$74 | U1.P$85 30.84,19.06 30.58,19.06 U1.P$74 | 29.19,20.97 28.55,20.33 U1.P$79 | U1.P$80 29.82,20.33 U1.P$74 | 30.97,20.33 U1.P$81 U1.P$74 | 32.23,19.06 32.23,17.92 U1.P$90 | 32.23,19.06 U1.P$86 | 32.23,19.06 U1.P$74 | 31.6,20.84 32.11,20.33 U1.P$82 | 29.19,20.97 29.69,21.48 U1.P$76
  Top 0.127: 29.19,20.97 U1.P$74 | 31.6,20.84 30.97,21.48 U1.P$77 | 31.6,20.84 U1.P$74 | 32.23,21.48 U1.P$78 | 32.23,21.48 U1.P$74 | 34.9,21.73 34.39,21.73 33.76,21.1 33.25,21.1 33.12,21.22 | 33.12,21.22 U1.P$F23 | J1.8 10.39,19.45 10.01,19.45 9.88,19.32 9.88,15.25 10.01,15.13 10.39,15.13 J1.17 10.52,15 11.79,15 14.96,11.83 16.23,11.83 16.87,12.46 16.87,13.48 | 15.85,14.49 15.47,14.11 15.09,14.11 14.84,14.37 14.33,14.37 R2_EP_DR.1 14.2,14.49 12.42,16.27 12.42,16.52 13.19,17.29 | 16.87,13.48 17.76,13.48 18.27,13.98 18.27,14.87 C39.2 | 15.85,14.49 16.87,13.48 | 15.85,14.49 C1-EP-DR.2 | 13.19,17.29 13.82,17.29 D4.1 | 7.6,24.4 7.72,24.27 7.72,23.89 J1.MP1 | 7.6,24.4 5.31,26.69 4.93,26.69 C34.2 | 11.28,28.97 10.39,28.08 10.39,27.19 EPD_C7.1 | 11.28,28.97 11.28,30.24 10.14,30.24 9.5,29.61 EPD_C5.1 | v16.74,30.11 16.99,30.37 17.5,30.37 C24.1 | v11.91,28.97 11.28,28.97 | 7.6,24.4 8.99,25.8 v9.12,25.8 | 13.19,17.29 13.19,18.3 v12.68,18.81 | 28.55,21.61 U1.P$74 | 28.55,21.61 U1.P$75 | EPD_C12.1 3.53,7 5.56,7 EPD_C11.1 5.69,7 7.85,7 EPD_C10.1 7.98,7 v9.38,7 10.14,7 EPD_C9.1 | 13.57,7 16.11,7 EPD_C6.1 16.23,6.87 20.93,6.87 22.84,4.97 23.85,4.97 24.49,4.33 24.49,4.08 SW_ENT.1 24.62,3.95 26.14,3.95 27.54,2.55 TP_BAT_GND.TP 27.66,2.43 28.17,2.43 29.44,1.16 30.46,1.16 31.47,2.17 31.47,4.21 32.62,5.35 | 13.57,7 12.93,7 EPD_C8.1 | 13.57,7 13.57,5.73 | 13.57,5.73 13.57,4.08 SW_UP.1 | 13.57,5.73 v12.55,5.73 | 20.04,20.21 20.04,18.3 C5.2 | 20.04,20.21 20.04,21.1 20.42,21.48 20.42,23.38 C30.1 20.42,23.51 20.04,23.51 18.77,24.78 18.77,29.1 | 23.09,19.45 22.33,19.45 C14.2 | 23.09,19.45 23.47,19.45 23.73,19.19 25.5,19.19 IC1.D2
  Top 0.127: C38.1 21.95,18.18 21.95,19.19 22.2,19.45 C14.2 | 23.09,19.45 23.09,20.97 C8.2 | 20.04,20.21 21.57,20.21 22.2,19.57 C14.2 | C18.2 25.25,20.72 25.25,21.1 25.38,21.22 25.38,21.99 C10.2 25.25,22.11 25.25,22.37 25,22.62 23.85,22.62 23.6,22.37 | 23.34,23 23.34,22.62 23.6,22.37 | 23.34,23 23.34,23.38 C12.2 | 23.6,22.37 C15.2 | C17.1 26.65,24.53 25.5,24.53 C7.2 25.38,24.53 25.38,24.65 23.47,26.56 23.47,28.97 | 23.47,28.97 22.84,28.97 22.71,29.1 C33.2 22.58,29.1 21.95,28.46 20.93,28.46 | 23.47,28.97 23.85,28.97 | 23.85,28.97 24.11,28.97 R3.1 | 18.77,29.1 20.3,29.1 20.93,28.46 | 23.34,23 22.58,23 20.93,24.65 20.93,28.46 | 18.77,29.1 C25.2 | C43.2 30.58,26.3 30.58,26.56 29.57,27.57 29.31,27.57 29.19,27.45 28.93,27.45 C42.2 28.81,27.32 28.81,27.19 28.68,27.07 28.3,27.07 27.66,27.7 27.66,28.34 | 16.36,32.78 16.36,33.16 IC9.B1 16.23,33.16 16.11,33.16 15.85,33.42 15.47,33.42 C23.2 | 16.36,32.78 IC9.C2 | 16.36,32.78 IC9.C1 | IC9.C2 IC9.C3 | IC9.C2 | 27.66,28.34 26.9,28.34 C19.2 | 28.81,29.48 29.06,29.73 D3.2 28.81,29.48 | 28.81,29.48 27.66,28.34 | 28.81,29.48 27.79,30.49 | 27.79,30.49 26.65,31.64 26.14,31.64 25.89,31.38 25.89,31.26 IC3.8 25.76,31.26 25.5,31.26 IC3.9 25.38,31.26 25.25,31.38 25.25,31.64 | IC9.C3 17.38,32.78 18.9,34.3 23.47,34.3 25.25,32.53 25.25,31.64 | IC9.C3 | 23.85,28.97 23.85,31.26 24.23,31.64 25.25,31.64 | IC2.B1 42.78,21.61 42.39,21.99 42.39,22.24 43.28,23.13 44.55,23.13 C32.1 44.55,23.26 44.55,23.38 44.68,23.51 | 44.94,25.92 44.68,25.67 44.68,23.51 | 44.94,25.92 45.19,26.18 45.32,26.18 R_TYPE_SEL.1 | 39.86,26.05 39.86,25.92 C31.1 | 39.86,26.05 40.11,26.3 41.63,26.3 41.76,26.18 U3.1 41.89,26.05 42.27,26.05
  Top 0.127: 42.78,25.16 42.9,25.29 U3.9 | 42.78,25.16 42.27,24.65 41.89,24.65 U3.4 | 42.78,25.16 43.79,25.16 U3.6 | 42.78,25.16 U3.9 | 42.27,26.05 42.9,25.41 U3.9 | 42.52,26.56 42.52,26.3 42.27,26.05 | 44.94,25.92 44.3,26.56 42.52,26.56 | 40.74,17.54 40.74,16.27 42.01,15 | 40.74,17.54 40.74,17.92 C29.1 | 42.01,15 43.92,13.1 J4.SH2 44.05,12.97 44.05,4.46 J4.SH1 43.92,4.33 42.27,2.68 42.27,2.43 TP_GND.TP 42.14,2.43 41.76,2.43 39.86,4.33 J4.SH3 39.73,4.46 39.35,4.84 39.35,5.48 J4.A1_B12 39.22,5.48 36.81,5.48 36.43,5.86 | 40.74,17.54 41.25,17.54 41.51,17.8 41.51,18.18 44.17,20.84 44.17,21.22 43.92,21.48 43.79,21.48 IC2.B3 | J2.3 28.55,8.52 29.69,8.52 J2.5 29.82,8.4 29.82,8.14 32.62,5.35 | 37.06,7.25 37.06,6.49 R1_USB.1 37.06,6.36 36.93,6.36 36.43,5.86 | 35.54,4.97 36.43,5.86 | 35.54,4.97 35.54,4.33 SW_DN.1 | 32.62,5.35 32.74,5.22 35.28,5.22 35.54,4.97 | 44.68,23.51 45.19,23.51 45.32,23.38 45.32,18.3 42.01,15 | 27.79,30.49 28.68,31.38 34.52,31.38 39.86,26.05 | 37.06,7.25 R2_USB.2 | SJ1.1 39.58,31.51 39.58,31.38 42.52,28.44 42.52,26.56
  Bottom 0.127: v31.98,23.51 31.98,21.73 32.11,21.61 U1.P$78 | v28.81,16.02 28.81,17.54 28.55,17.8 U1.P$87 | 16.87,30.11 17.76,30.11 26.39,21.48 28.42,21.48 U1.P$75 | 16.87,30.11 14.58,27.83 14.33,27.83 13.19,28.97 v11.91,28.97 9.12,26.18 v9.12,25.8 9.12,20.72 11.03,18.81 v12.68,18.81 | 16.87,30.11 v16.74,30.11 | v9.38,7 10.52,7 11.79,5.73 v12.55,5.73
JJ  (via drill 0.3)
  Top 0.127: v24.87,15.89 24.49,15.89 23.85,15.25 23.85,15 C16.1 | 24.87,21.73 24.87,21.99 C10.1 | 24.87,21.73 v24.87,21.35 | 24.87,21.73 23.47,21.73 23.09,22.11 23.09,22.24 C15.1 | v30.97,23.76 30.84,23.64 29.31,23.64 28.42,22.75 28.42,22.49 U1.P$B5 | v33.63,21.99 33.63,21.48 U1.P$E24 | v35.79,21.86 36.93,21.86 37.57,22.49 L3.2
  Bottom 0.127: 25.38,16.4 v24.87,15.89 | 25.38,16.4 25.38,20.84 v24.87,21.35 | v30.97,23.76 31.22,23.76 31.73,24.27 32.23,24.27 33.38,23.13 33.38,22.24 v33.63,21.99 33.76,21.86 34.01,21.86 | 34.01,21.86 v35.79,21.86 | 25.38,16.4 27.79,16.4 30.08,14.11 34.78,14.11 35.92,15.25 35.92,18.81 34.01,20.72 34.01,21.86
LX1
  Top 0.127: 17.12,33.16 16.74,33.16 IC9.B2 | 17.12,33.16 17.25,33.16 17.63,33.54 17.63,34.18 17.25,34.56 13.44,34.56 12.93,34.05 12.93,30.49 13.57,29.86 L7.1 | 17.12,33.16 IC9.B3
LX2  (via drill 0.3)
  Top 0.127: 17.12,32.4 16.74,32.4 IC9.D2 | 17.12,32.4 17.63,32.4 v17.76,32.53 | v16.11,31.51 16.11,30.24 15.73,29.86 L7.2 | 17.12,32.4 IC9.D3
  Bottom 0.127: v17.76,32.53 17.12,32.53 v16.11,31.51
N$1  (via drill 0.3)
  Top 0.127: v24.36,19.7 25.5,19.7 25.89,19.32 IC1.D1 | v23.47,18.81 22.71,18.05 22.71,17.92 22.08,17.29 21.57,17.29 21.44,17.16 21.44,16.4 21.69,16.14 21.69,15.76 21.31,15.38 R9.2
  Bottom 0.127: v23.47,18.81 v24.36,19.7
N$2
  Top 0.127: IC9.D1 16.23,32.4 15.98,32.4 14.71,31.13 R4.2
N$3
  Top 0.127: IC9.E1 16.36,31.89 16.87,31.38 17.88,31.38 18.27,31.77 18.27,32.15 R2.2
N$4
  Top 0.127: R3.2 24.23,28.46 24.36,28.46 24.87,28.97 24.87,29.61 IC3.1
N$5
  Top 0.127: U1.P$AC5 28.3,16.91 27.54,16.91 26.39,15.76 26.39,14.49 C20.1
N$6
  Top 0.127: U1.P$F2 27.54,21.22 27.28,21.22 27.16,21.35 26.65,21.35 25.38,20.08 25.12,20.08 24.62,20.59 C18.1 24.62,20.72 23.98,20.72 21.19,23.51 21.19,24.02 19.41,25.8 X2.1
N$7
  Top 0.127: U1.P$D2 27.54,21.73 27.54,24.14 27.28,24.4 C17.2 27.16,24.4 27.16,24.27 26.9,24.02 23.85,24.02 22.08,25.8 X2.2
N$8  (via drill 0.3)
  Top 0.127: v26.52,21.99 27.03,21.99 U1.P$C1 | v33.63,15.89 33.63,15.64 34.01,15.25 34.01,14.24 v31.22,11.44 | v22.71,12.59 21.19,12.59 19.53,14.24 19.53,18.18 C5.1
  Bottom 0.127: v26.52,21.99 28.17,21.99 29.44,23.26 31.09,23.26 31.85,24.02 32.11,24.02 33.12,23 33.12,16.4 v33.63,15.89 | v31.22,11.44 30.71,10.94 30.58,10.94 29.82,10.17 25.12,10.17 v22.71,12.59
N$9
  Top 0.127: U1.P$N24 33.63,19.45 34.9,19.45 35.16,19.7 C9.1
N$10
  Top 0.127: U1.P$B3 27.92,22.49 27.92,24.14 28.17,24.4 L2.1
N$11
  Top 0.127: L3.1 36.68,22.62 36.68,25.8 36.81,25.92 36.81,27.95 36.43,28.34 33.89,28.34 30.33,24.78 29.57,24.78 29.31,24.53 L2.2
N$12  (via drill 0.3)
  Top 0.127: U1.P$H23 33.12,20.72 33.38,20.72 33.5,20.84 v34.52,20.84 35.03,20.84 C3.1 | v36.17,20.84 36.93,20.84 L1.1
  Bottom 0.127: v34.52,20.84 v36.17,20.84
N$13
  Top 0.127: 36.93,17.67 37.7,17.67 ANT1.1 36.93,17.67 | 36.93,17.67 35.66,17.67 35.28,18.05 35.28,18.3 C4.1 | 36.93,17.67 36.93,19.32 C22.1 36.93,19.45 36.93,19.7 37.95,20.72 L1.2
N$14  (via drill 0.3)
  Top 0.127: v34.14,23.13 33.76,23.13 33.12,22.49 33.12,21.73 U1.P$D23 | v35.41,23.13 35.41,22.37 C11.1
  Bottom 0.127: v35.41,23.13 v34.14,23.13
N$15  (via drill 0.3)
  Top 0.127: U1.P$A23 33.12,23 33.12,24.53 33.25,24.65 C2.1 33.38,24.78 v33.38,25.67 | v36.17,25.67 36.55,26.05 36.55,27.07 36.43,27.19 36.3,27.19 35.92,27.57 X1.3
  Bottom 0.127: v33.38,25.67 v36.17,25.67
N$16
  Top 0.127: U1.P$B24 33.63,22.49 34.14,22.49 34.65,23 34.65,23.89 35.16,24.4 C1.1 35.16,24.53 34.52,25.16 34.52,26.43 X1.1
N$17
  Top 0.127: L5.2 4.17,28.46 3.02,27.32 3.02,25.8 C2-EP-DR.2 2.9,25.67 2.9,25.54 2.64,25.29 2.14,25.29 2.01,25.41 2.01,31.26 3.41,32.65 9.63,32.65 12.68,29.61 12.68,28.72 16.74,24.65 D5.2 16.74,24.53 16.74,19.83 18.77,17.8 18.77,14.11 17.76,13.1 17.76,11.7 Q3.3
N$18
  Top 0.127: C2-EP-DR.1 2.52,25.8 2.52,31.38 3.53,32.4 9.5,32.4 12.42,29.48 12.42,26.81 14.2,25.03 14.2,20.84 14.07,20.72 D2.1 14.07,20.59 17.25,17.41 D4.2
N$20  (via drill 0.3)
  Top 0.127: R1_EP_DR.1 44.38,30.68 42.23,32.26 SJ1.2 40.94,31.44 45.32,27.07 v45.32,26.69 | v45.32,25.16 45.32,25.54 R_TYPE_SEL.2
  Bottom 0.127: v45.32,26.69 v45.32,25.16
N$22
  Top 0.127: U1.P$A18 31.6,23.26 31.47,23.38 31.47,24.02 C13.1
N$23
  Top 0.127: C32.2 44.94,23.13 44.94,23 44.43,22.49 43.67,22.49 43.28,22.11 IC2.A2
N$24  (via drill 0.3)
  Top 0.127: v8.87,26.69 9.63,25.92 9.63,21.99 10.01,21.61 10.39,21.61 J1.4 | v8.87,28.21 6.96,30.11 6.96,30.24 6.33,30.88 EPD_C2.2
  Bottom 0.127: v8.87,28.21 v8.87,26.69
N$25  (via drill 0.3)
  Top 0.127: v8.61,24.78 8.61,22.49 10.01,21.1 10.39,21.1 J1.5 | v6.71,28.21 4.68,30.24 4.68,31 4.04,31.64 EPD_C1.2
  Bottom 0.127: v8.61,24.78 8.61,26.3 v6.71,28.21
N$28
  Top 0.127: J1.18 10.52,14.49 10.77,14.49 16.11,9.16 16.11,8.27 EPD_C6.2
N$29  (via drill 0.3)
  Top 0.127: v9.63,20.84 9.63,14.49 10.01,14.11 10.39,14.11 J1.19 | v11.66,25.29 11.66,27.07 EPD_C7.2
  Bottom 0.127: v9.63,20.84 9.63,23.26 v11.66,25.29
N$30
  Top 0.127: J1.20 10.52,13.48 10.77,13.48 12.8,11.44 12.8,8.27 EPD_C8.2
N$31
  Top 0.127: R1_USB.2 37.19,5.98 37.31,5.98 38.46,7.13 38.46,7.25 38.58,7.38 39.22,7.38 J4.A5
N$32
  Top 0.127: J1.22 10.39,12.59 9.5,12.59 8.49,11.57 8.49,8.78 7.98,8.27 EPD_C10.2
N$33
  Top 0.127: C31.2 40.24,25.92 40.24,25.03 R8.1
N$34
  Top 0.127: J1.24 10.52,11.44 10.52,9.16 10.9,8.78 10.9,7.89 10.65,7.63 4.04,7.63 3.53,8.14 EPD_C12.2
N$35
  Top 0.127: R2_USB.1 37.19,7.89 37.19,8.91 38.71,10.43 39.22,10.43 J4.B5
N$36
  Top 0.127: C29.2 41.12,17.92 41.12,18.18 42.52,19.57 42.52,19.83 42.14,20.21 41.38,20.21 R7.1
OUT+
  Top 0.127: IC2.A3 43.79,21.99 43.92,21.99 44.43,21.48 44.43,19.32 43.16,18.05 TP_OP.TP
P0.13/1.5D  (via drill 0.3)
  Top 0.127: C30.2 20.8,23.38 20.8,22.24 R5.1 20.93,22.11 21.06,22.11 21.31,21.86 v21.31,20.72 | v12.04,7.25 12.04,5.6 10.77,4.33 10.77,4.08 SW_UP.2
  Bottom 0.127: v21.31,20.72 21.31,19.19 12.04,9.92 v12.04,7.25
P1.01/1.6C  (via drill 0.3)
  Top 0.127: v18.39,19.19 18.39,21.99 18.77,22.37 R_PWR_EPD.1 | v19.15,10.81 19.15,10.05 19.28,9.92 DMG2305UX-7.1
  Bottom 0.127: v18.39,19.19 18.39,16.65 11.53,9.79 11.53,7.13 11.91,6.75 14.71,6.75 18.77,10.81 v19.15,10.81
PMIC_INT  (via drill 0.3)
  Top 0.127: v24.87,17.54 25.5,17.54 25.89,17.92 IC1.A1 | v24.87,16.52 25.89,16.52 v26.77,17.41 | v27.54,18.18 27.54,18.68 U1.P$T2
  Bottom 0.127: v24.87,16.52 v24.87,17.54 | v27.54,18.18 v26.77,17.41
PREVGH  (via drill 0.3)
  Top 0.127: v9.63,13.1 10.39,13.1 J1.21 | v9.63,12.08 9.63,8.91 10.14,8.4 EPD_C9.2 | v13.31,21.35 13.31,24.53 D5.1
  Bottom 0.127: v9.63,12.08 v9.63,13.1 9.63,15.13 13.31,18.81 v13.31,21.35
PREVGL
  Top 0.127: 11.15,7.76 11.15,6.87 10.65,6.36 3.02,6.36 2.77,6.62 2.77,8.65 3.02,8.91 4.93,8.91 5.56,8.27 EPD_C11.2 | 11.15,7.76 11.15,11.7 10.9,11.95 10.52,11.95 J1.23 | 11.15,7.76 12.17,7.76 12.3,7.63 17.25,7.63 18.14,8.52 18.14,10.43 19.03,11.32 19.03,17.92 17.63,19.32 17.63,20.59 D2.2
RESE  (via drill 0.3)
  Top 0.127: v44.3,29.48 44.3,30.11 R1_EP_DR.2 | v17.63,8.65 17.63,9.03 15.73,10.94 Q3.2 | v11.15,16.02 11.15,21.61 10.77,21.99 10.52,21.99 J1.3
  Bottom 0.127: v44.3,29.48 44.3,19.57 29.82,5.09 21.19,5.09 v17.63,8.65 15.22,6.24 11.66,6.24 11.03,6.87 11.03,10.05 11.15,10.17 v11.15,16.02
RESET  (1 unrouted)
  Top 0.127: J2.6 29.82,9.79 29.82,10.17 30.71,11.06 30.71,14.8 TP_RESET.TP
SCL/1.4C
  Top 0.127: IC2.C1 42.78,21.1 42.14,21.73 42.14,22.37 44.05,24.27 44.3,24.27 44.43,24.4 44.43,25.41 44.3,25.54 43.92,25.54 U3.7
SCL/2.4C  (via drill 0.3)  (1 unrouted)
  Top 0.127: 14.07,31.64 14.58,31.64 R4.1 | 14.07,31.64 13.57,31.64 R17.2 | v24.23,16.27 24.23,16.52 24.74,17.03 25.88,17.03 26.27,17.42 26.27,18.18 26,18.44 IC1.B1 | v24.36,29.86 24.74,30.24 IC3.12 | v14.07,31.51 14.07,31.64 | v23.22,30.62 23.09,30.75 23.09,32.91 TP_SCL.TP
  Bottom 0.127: v24.23,16.27 24.23,15.89 24.74,15.38 25.38,15.38 26.14,16.14 27.66,16.14 29.95,13.86 34.9,13.86 36.68,15.64 36.68,21.61 35.66,22.62 34.01,22.62 33.63,23 33.63,23.26 30.33,26.56 27.66,26.56 v24.36,29.86 23.6,30.62 v23.22,30.62 15.98,30.62 15.09,31.51 v14.07,31.51
SDA/1.4C  (1 unrouted)
SDA/2.4C  (via drill 0.3)
  Top 0.127: 26.52,19.45 27.03,19.95 U1.P$L1 | 26.52,19.45 26.01,18.94 25.89,18.94 IC1.C1 | v16.49,34.05 15.09,34.05 14.71,33.67 13.69,33.67 R18.2 | v18.52,33.29 18.52,32.91 18.39,32.78 R2.1 | v25.5,30.62 25.5,29.73 IC3.2 | 26.52,19.45 26.27,19.7 v26.14,19.7 | v17.12,27.95 14.84,27.95 v14.45,28.34 | v25,33.42 25.38,33.03 26.27,33.03 TP_SDA.TP
  Bottom 0.127: 23.85,32.27 22.84,33.29 v18.52,33.29 17.25,34.56 16.99,34.56 v16.49,34.05 15.6,34.05 13.31,31.77 13.31,31 14.45,29.86 v14.45,28.34 | 23.85,32.27 v25.5,30.62 | v26.14,19.7 26.14,18.56 26.52,18.18 26.77,18.18 27.16,18.56 27.16,20.08 18.52,28.72 17.88,28.72 v17.12,27.95 | 23.85,32.27 v25,33.42
SWDCLK  (via drill 0.3)
  Top 0.127: v34.14,17.41 33.63,17.41 U1.P$AA24 | v34.65,14.62 34.65,13.22 v32.23,10.81 | 27.54,5.09 27.54,4.84 29.82,2.55 TP_SWDCLK.TP | 27.54,5.09 v27.54,7.13 | 27.54,5.09 25.38,5.09 25.25,5.22 22.96,5.22 20.55,7.63 20.55,10.3 20.8,10.56 21.31,10.56 24.49,13.73 25.38,13.73 25.63,13.48 26.27,13.48 27.54,12.21 27.54,11.06 28.42,10.17 28.42,9.79 J2.4
  Bottom 0.127: v34.14,17.41 35.66,15.89 35.66,15.64 v34.65,14.62 | v32.23,10.81 32.23,8.14 31.35,7.25 30.58,7.25 29.69,8.14 28.55,8.14 v27.54,7.13
SWDIO
  Top 0.127: U1.P$AC24 33.63,16.91 34.27,16.91 34.65,16.52 34.65,15.25 35.16,14.75 35.16,13.1 31.22,9.16 27.79,9.16 27.28,9.67 J2.2 27.16,9.79 26.9,10.05 25.63,10.05 23.85,8.27 21.82,8.27 TP_SWDIO.TP
SWO
  Top 0.127: U1.P$AD22 32.62,16.4 32.62,15 32.74,14.87 TP_SWO.TP
VBAT/1.2A
  Top 0.127: U3.2 41.89,25.54 41.89,25.16 U3.3 41.76,25.03 41.51,25.03 41.25,24.78 41.25,23.51 41.76,23 C27.2 41.63,22.88 41.63,22.75 40.24,21.35 TP_VBAT.TP
VBAT/2.5C
  Top 0.127: IC1.C2 25.5,18.81 24.11,18.81 22.2,16.91 C37.2
VBUS/1.5D  (via drill 0.3)
  Top 0.127: v40.24,7.76 40.24,6.87 39.73,6.36 39.35,6.36 J4.A4_B9 | 40.24,10.56 v40.24,9.67 | 40.24,10.56 39.73,11.06 39.35,11.06 J4.A9_B4 | v28.55,27.95 28.55,27.45 C42.1 | v29.44,27.07 29.44,26.3 C43.1 | v30.2,29.1 30.71,29.61 31.6,29.61 D3.5 | 40.24,10.56 41.12,11.44 41.12,13.35 39.22,15.25 39.22,17.8 v39.47,18.05
  Bottom 0.127: v40.24,9.67 v40.24,7.76 | 28.81,27.7 v29.44,27.07 30.2,27.07 32.11,25.16 34.01,25.16 39.47,19.7 v39.47,18.05 | 28.81,27.7 v28.55,27.95 | 28.81,27.7 v30.2,29.1
VBUS/2.6D  (via drill 0.3)
  Top 0.127: v26.9,15.64 26.9,15.76 27.54,16.4 U1.P$AD2 | v24.62,14.24 22.2,14.24 21.95,13.98 20.93,13.98 20.3,14.62 C21.1 20.3,14.75 20.3,15.64 20.93,16.27 20.93,17.03 21.44,17.54 21.95,17.54 22.33,17.92 22.33,18.18 C38.2 | v23.73,15.89 23.73,17.03 24.74,18.05 25.5,18.05 IC1.A2
  Bottom 0.127: v26.9,15.64 26.01,15.64 25,14.62 | v24.62,14.24 25,14.62 | 25,14.62 v23.73,15.89
VREG  (via drill 0.3)
  Top 0.127: 16.74,33.54 16.36,33.54 IC9.A1 16.23,33.54 15.98,33.8 15.22,33.8 15.09,33.67 15.09,33.42 C23.1 | 16.74,33.54 17.12,33.54 IC9.A3 17.12,33.67 v17.12,34.05 | 16.74,33.54 IC9.A2 | 19.03,32.02 19.92,32.91 TP_VREG.TP | 19.03,32.02 18.9,31.89 18.9,30.49 C24.2 18.77,30.37 18.14,29.73 18.14,28.72 18.52,28.34 18.52,24.14 v19.92,22.75 | 19.03,32.02 v18.9,32.02 | v23.34,17.41 24.36,18.43 25.5,18.43 IC1.B2 | v18.27,15.51 17.76,15 C39.1
  Bottom 0.127: v17.12,34.05 17.12,33.8 v18.9,32.02 | 21.82,17.41 20.17,17.41 v18.27,15.51 | 21.82,17.41 v23.34,17.41 | v19.92,22.75 21.82,20.84 21.82,17.41